# Altium PCB Backup.PcbDoc
Units mil, origin at the board's own origin, x right, y up, seen from the top; angles counter-clockwise.
Board outline 985 x 395 mil, 4 copper layers (Top, GND, Power, Bottom), stack 61.811 mil thick; 38 components, 30 nets, 145 pads, 33 vias.
Unrouted connection lines stored in the file: 67.
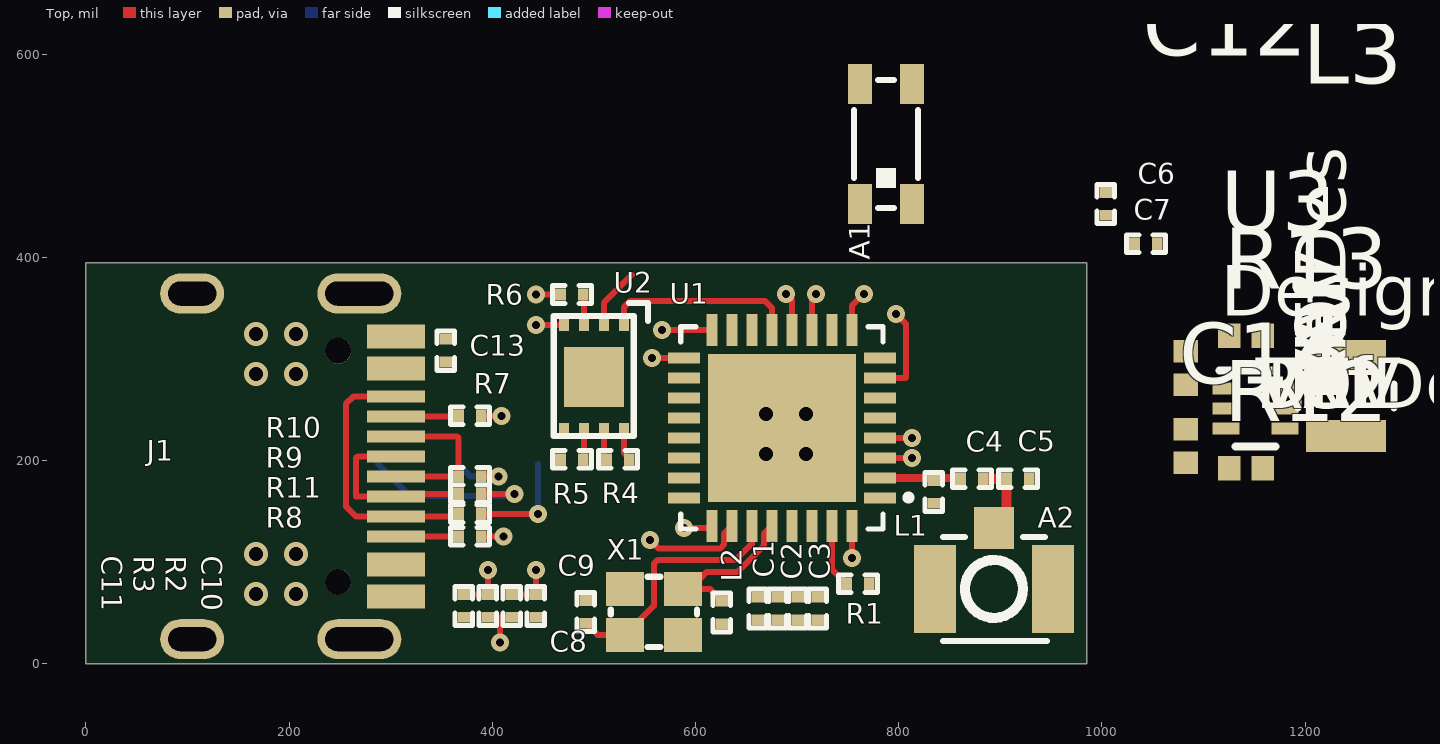
[diagram p0: Top view]
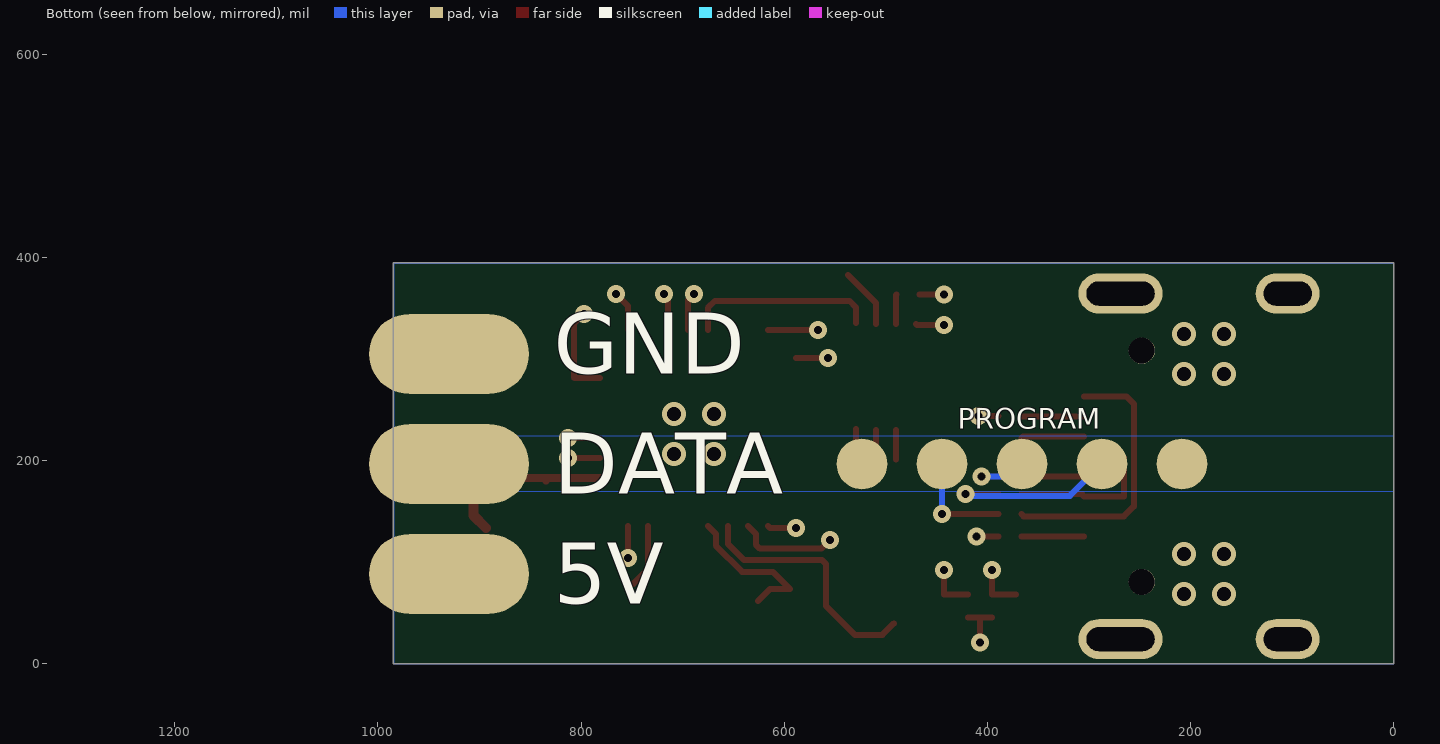
[diagram p1: Bottom view, seen from below]
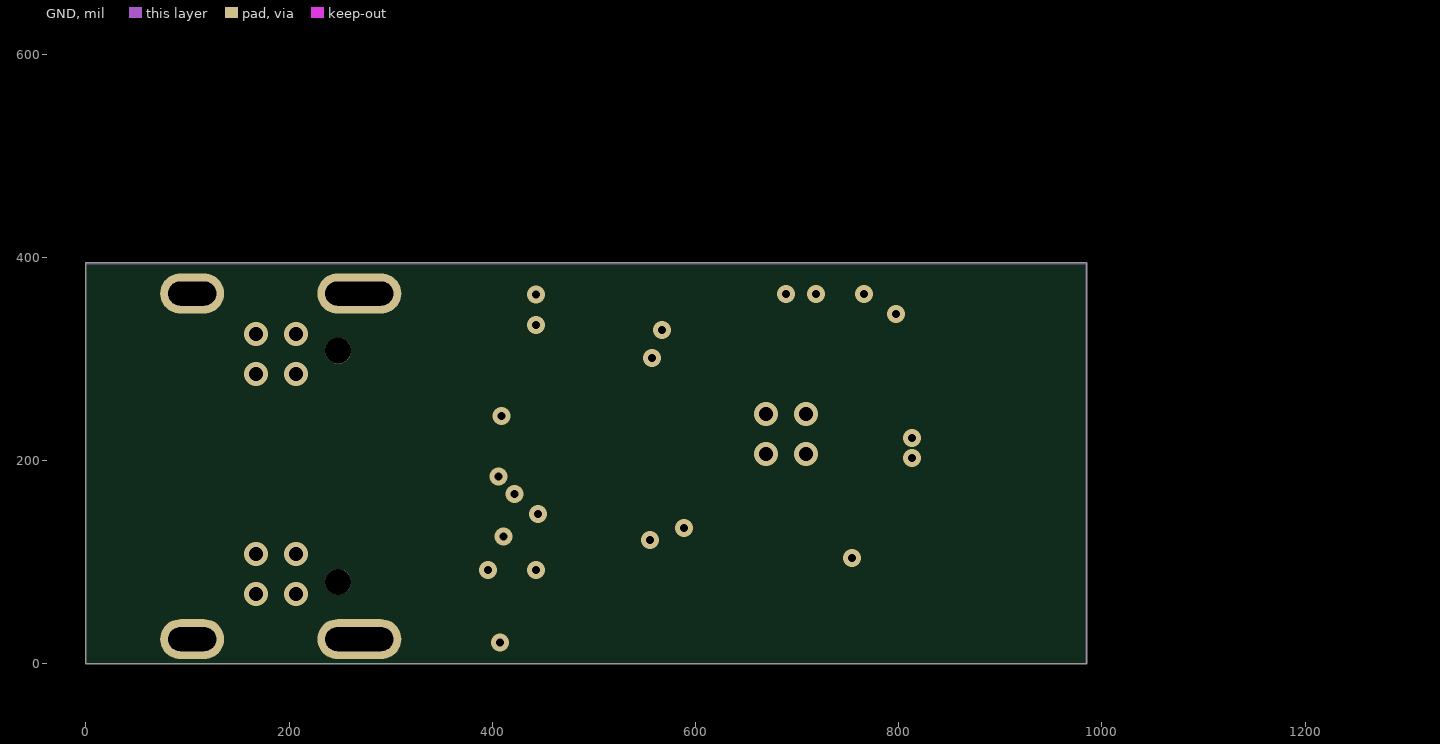
[diagram p2: GND]
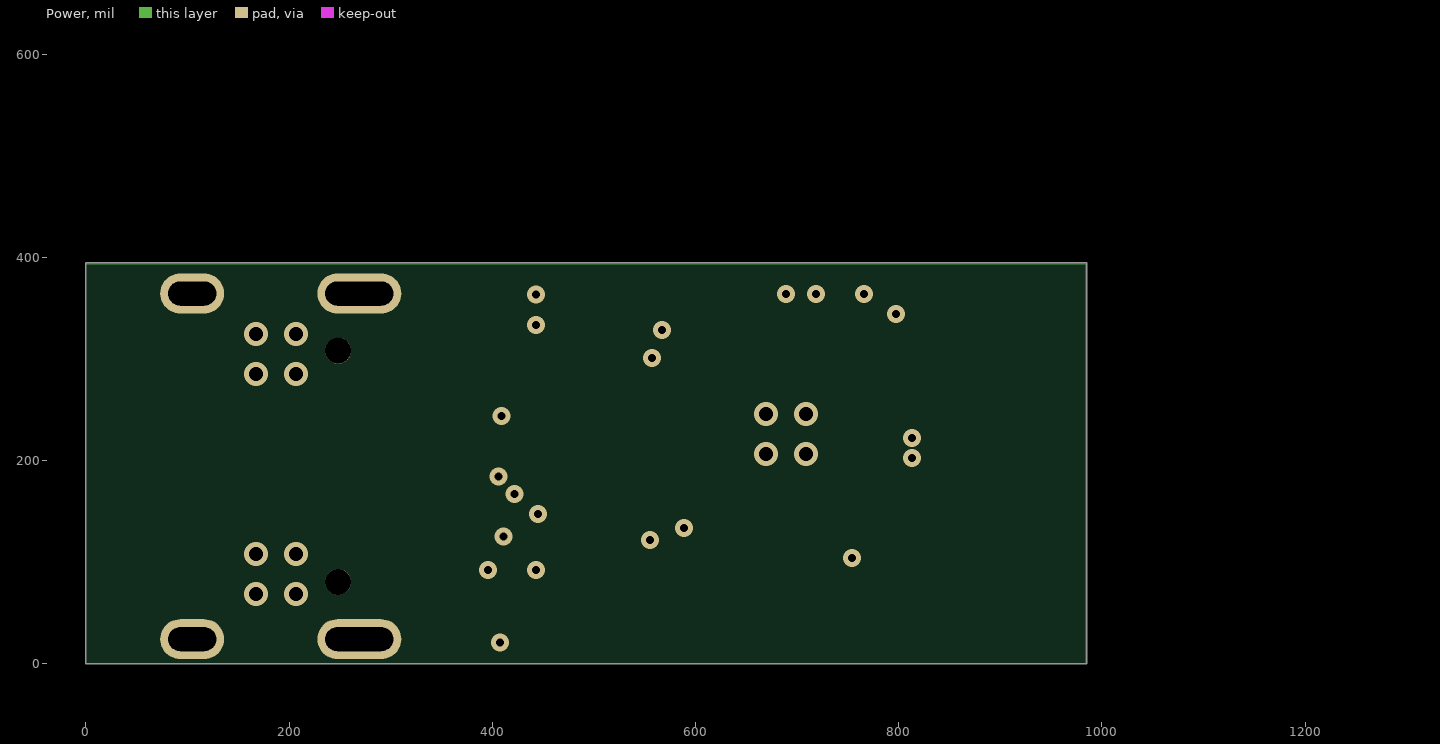
[diagram p3: Power]

## Layer stack, top to bottom
Top Solder: solder mask 0.4, Solder Resist, Dk 3.5
Top: signal copper 1.378
Prepreg: core 7.874, 7628, Dk 4.2
GND: signal copper 0.689
Core: prepreg 41.9291, FR4, Dk 4.2
Power: signal copper 0.689
Prepreg: core 7.874, 7628, Dk 4.2
Bottom: signal copper 1.378
Bottom Solder: solder mask 0.4, Solder Resist, Dk 3.5

## Board outline
0,0 0,395 985,395 985,0

## Design rules (kind name [scope] priority, off if disabled: settings)
Clearance [All] p1: gap=3.5 ignorepadtopadclearanceinfootprint=TRUE
ComponentClearance [All] p1 off: gap=10 collisioncheckmode=3 verticalgap=10 showdistances=FALSE
DiffPairsRouting [All] p1: maxlimit=10 minlimit=3.5 mostfreqgap=7.87 toplayer_minwidth=3.5 toplayer_maxwidth=15 toplayer_prefwidth=5.91 midlayer1_minwidth=3.5 midlayer1_maxwidth=15 midlayer1_prefwidth=5.91 midlayer2_minwidth=3.5 midlayer2_maxwidth=15 midlayer2_prefwidth=5.91 bottomlayer_minwidth=3.5 bottomlayer_maxwidth=15 bottomlayer_prefwidth=5.91 maxuncoupledlength=500
MatchedLengths usb [All] p1: tolerance=39.37 checknetsindiffpair=FALSE checkdiffpairvsdiffpair=TRUE checkxsignals=TRUE checkothers=TRUE
PolygonConnect 2pinconn [InNet('GND')] p1 off: connectstyle=Direct reliefconductorwidth=10 reliefentries=4 polygonreliefangle="90 Angle" airgapwidth=10
PolygonConnect vbus [InNet('VBUS')] p2 off: connectstyle=Direct reliefconductorwidth=10 reliefentries=4 polygonreliefangle="90 Angle" airgapwidth=10
PolygonConnect nothermals [InNet('VOUT')] p3 off: connectstyle=Direct reliefconductorwidth=0 reliefentries=4 polygonreliefangle="90 Angle" airgapwidth=0
PolygonConnect PolygonConnect_1 [All] p4 off: connectstyle=Relief reliefconductorwidth=10 reliefentries=4 polygonreliefangle="90 Angle" airgapwidth=10
RoutingVias [All] p1: holewidth=7.87 width=17.72 viastyle="Through Hole" minholewidth=7.87 minwidth=17.72 maxholewidth=248.03 maxwidth=50
SolderMaskExpansion [All] p1: expansion=4
Width [All] p1: maxlimit=39.37 minlimit=5 preferedwidth=7.87
28 further rules are at their usual default settings.

## Components (designator, comment, footprint, x,y, rotation, side; value= is the part's Value field where it differs from the comment)
A1 "2450AT18D0100" 2450AT18D0100_STD-L 787.4,511.81 r90 top
A2 "U.FL-R-SMT-1" "COAXIAL RF U.FL-R-SMT-1" 893.7,73.82 r180 top locked
C1 "1uF" CAPC0603X03L_C 681.1,54.53 r270 top value=N.C.
C2 "100uF" CAPC0603X03L_C 700.79,54.53 r270 top value=N.C.
C3 "1uF" CAPC0603X03L_C 720.47,54.53 r270 top value=N.C.
C4 "8.2pF" CAPC0603X03L_C 872.05,182.09 r180 top value=N.C.
C5 "2.4pF" CAPC0603X03L_C 917.32,182.09 r180 top value=N.C.
C6 "8.2pF" CAPC0603X03L_C 1003.94,452.76 r270 top value=N.C.
C7 "2.4pF" CAPC0603X03L_C 1043.31,413.39 r180 top value=N.C.
C8 "10pF" CAPC0603X03L_C 625.98,50.59 r270 top value=N.C.
C9 "10pF" CAPC0603X03L_C 492.13,51.18 r90 top value=N.C.
C10 "100nF" CAPC0603X03L_C 442.91,57.09 r270 top value=N.C.
C11 "100nF" CAPC0603X03L_C 372.05,57.09 r270 top value=N.C.
C12 "C1005X5R1A475K050BC" 0402 1082.68,291.34 r90 top value=4.7uF
C13 "1uF" CAPC0603X03L_C 354.33,308.31 r270 top value=N.C.
C14 "GRM188R60J226MEA0D" 0402 1082.68,214.57 r90 top value=22uF
J1 "USB-C" TYPE-C-31-M-12 305.12,322.48 r270 top locked
L1 "1.5nH" INDC0603X03L_C 834.65,169.29 r90 top
L2 "Ferride" INDC0603X03L_C 661.42,54.53 r270 top value=1.5nH
L3 "DFE252012F-1R0M=P2" DFE252012F 1240.16,263.78 r90 top value=1uH
PROGRAM "Programmer" ProgramPins 366.14,196.85 r180 bottom locked
R1 "12K" RESC0603X03L_C 759.84,78.74 r180 top value=0R
R2 "10K" RESC0603X03L_C 419.29,57.09 r270 top value=0R
R3 "10K" RESC0603X03L_C 395.67,57.09 r270 top value=0R
R4 "10K" RESC0603X03L_C 523.62,201.34 r0 top value=0R
R5 "50R" RESC0603X03L_C 478.35,201.34 r180 top value=0R
R6 "10K" RESC0603X03L_C 478.35,363.62 r0 top value=0R
R7 "1K" RESC0603X03L_C 377.95,244.09 r0 top value=0R
R8 "1K" RESC0603X03L_C 377.95,125.63 r0 top value=0R
R9 "0R" RESC0603X03L_C 377.95,167.32 r0 top
R10 "0R" RESC0603X03L_C 377.95,184.69 r0 top
R11 "0R" RESC0603X03L_C 377.95,147.64 r0 top
R12 "CRCW0402453KFKED" 0402 1141.73,192.56 r180 top value=453k
R13 "CRCW0402100KFKED" 0402 1141.73,322.83 r180 top value=100k
U1 "ESP8266EX" *QFN50P500X500X80-33N 685.04,232.28 r180 top locked
U2 "FM25Q08A-DN-T-G" FM25Q08A 470.47,334.65 r0 top
U3 "TLV62568ADRLR" DRL0006A 1151.18,251.61 r0 top value=N/A
X1 "26MHZ" BT-XTAL_2016 559.06,51.18 r0 top value=32MHz

## Footprints (in the part's own frame and the unit in brackets; to place one, negate y for a bottom-side part, rotate by r counter-clockwise, add the part's x,y. Pads: shape width x height; smd on the part's side, far side on the other; paste and mask are expansions set on the pad)
0402 [mil]
  rect 22x24 smd: 1(-16.5,0) 2(16.5,0)
  body extent -22,-12 22,12, height 22
2450AT18D0100_STD-L [mm]
  rect 1x0.6 smd mask+0.051: 1(-1.5,-0.65) 2(-1.5,0.65) 2(1.5,-0.65) 2(1.5,0.65)
  Top pour cut-out: -2,-5.05 -2,0.95 2,0.95 2,-5.05
  Bottom pour cut-out: -2,-5.05 -2,0.95 2,0.95 2,-5.05
  silkscreen extent -1.6,-0.8 1.6,0.8, body extent -1.61,-0.81 1.61,0.81, height 1.2
*QFN50P500X500X80-33N [mm]
  rect 0.8x0.27 smd: 1(-2.45,1.75) 2(-2.45,1.25) 3(-2.45,0.75) 4(-2.45,0.25) 5(-2.45,-0.25) 6(-2.45,-0.75) 7(-2.45,-1.25) 8(-2.45,-1.75) 17(2.45,-1.75) 18(2.45,-1.25) 19(2.45,-0.75) 20(2.45,-0.25) 21(2.45,0.25) 22(2.45,0.75) 23(2.45,1.25) 24(2.45,1.75)
  rect 0.27x0.8 smd: 9(-1.75,-2.45) 10(-1.25,-2.45) 11(-0.75,-2.45) 12(-0.25,-2.45) 13(0.25,-2.45) 14(0.75,-2.45) 15(1.25,-2.45) 16(1.75,-2.45) 25(1.75,2.45) 26(1.25,2.45) 27(0.75,2.45) 28(0.25,2.45) 29(-0.25,2.45) 30(-0.75,2.45) 31(-1.25,2.45) 32(-1.75,2.45)
  rect 3.7x3.7 smd: 33(0,0)
  silkscreen extent -3.24,-2.53 2.53,2.53, body extent -2.53,-2.53 2.53,2.53, height 0.85
BT-XTAL_2016 [mm]
  rect 0.95x0.85 smd: 1(-0.725,-0.575) 2(0.725,-0.575) 3(0.725,0.575) 4(-0.725,0.575)
  silkscreen extent -1.08,-0.88 1.08,0.88, body extent -1.05,-0.85 1.05,0.85, height 0.56
CAPC0603X03L_C [mm]
  rect 0.27x0.3 smd: 1(-0.285,0) 2(0.285,0)
  silkscreen extent -0.49,-0.22 0.49,0.22, body extent -0.3,-0.15 0.31,0.15, height 0.3
"COAXIAL RF U.FL-R-SMT-1" [mm]
  rect 1x1.05 smd: 1(0,-1.525)
  rect 1.05x2.2 smd: 2(-1.475,0) 2(1.475,0)
  Top pour cut-out: 0.85,1.3 -0.85,1.3 -0.85,-1.525 0.85,-1.525
  silkscreen extent -1.32,-1.3 1.28,1.3, body extent -1.5,-1.6 1.5,1.5, height 1.25
DFE252012F [mm]
  rect 0.8x2 smd paste+0 mask+0.051: 1(-1,0) 2(1,0)
  silkscreen extent -0.3,-1.2 0.3,1.2, body extent 0,0 0.25,0.25, height 0.25
DRL0006A [mm]
  rect 0.67x0.3 smd paste+0 mask+0.051: 1(-0.74,0.5) 2(-0.74,0) 3(-0.74,-0.5) 4(0.74,-0.5) 5(0.74,0) 6(0.74,0.5)
  silkscreen extent -0.9,-0.95 0.5,0.95, body extent 0,0 0.25,0.25, height 0.25
FM25Q08A [mm] "Flashboi"
  rect 0.25x0.35 smd: 1(1.5,0) 2(1,0) 3(0.5,0) 4(0,0) 5(0,-2.65) 6(0.5,-2.65) 7(1,-2.65) 8(1.5,-2.65)
  rect 1.5x1.5 smd: 4(0.75,-1.325)
  silkscreen extent -0.25,-2.8 2.1,0.53, body extent -0.13,-2.79 1.65,0.13, height 0.75
INDC0603X03L_C [mm]
  rect 0.27x0.3 smd: 1(-0.285,0) 2(0.285,0)
  silkscreen extent -0.49,-0.22 0.49,0.22, body extent -0.31,-0.16 0.31,0.16, height 0.26
ProgramPins [mm]
  round 1.27 smd: 1(4,0) 2(2,0) 3(0,0) 4(-2,0) 5(-4,0)
RESC0603X03L_C [mm]
  rect 0.27x0.3 smd: 1(-0.285,0) 2(0.285,0)
  silkscreen extent -0.49,-0.22 0.49,0.22, body extent -0.3,-0.15 0.3,0.15, height 0.23
TYPE-C-31-M-12 [mm]
  rect 0.6x1.45 smd: 1(0,0) 1(6.5,0) 2(0.8,0) 2(5.7,0)
  rect 0.3x1.45 smd: 3(1.5,0) 4(2,0) 5(2.5,0) 6(3,0) 7(3.5,0) 8(4,0) 9(4.5,0) 10(5,0)
  oval 1x2.1 hole 1.7 slot 0.6 at 0 deg: 11(-1.07,-0.915) 11(7.57,-0.915)
  oval 1x1.6 hole 1.2 slot 0.6 at 0 deg: 11(-1.07,-5.095) 11(7.57,-5.095)
  round 0.65 hole 0.65: 12(0.36,-1.445) 12(6.14,-1.445)
  body extent -1.27,-7.75 7.68,0, height 3.27

## Part data
A1: "2.45 GHz chip antenna", Manufacturer="Johanson Technology", Part Number="Johanson 2450AT18D0100_STD-L", Part number IPS=N.A., Supplier Part Number 1=2450AT18D0100E, Artikkelnr Noca=53059035, ComponentLink1Description=Datasheet, ComponentLink2Description="Supplier link", Footprint Doc=2450AT18D0100, HelpURL=http://www.johansontechnology.com/datasheets/antennas/2450AT18D0100.pdf, LatestRevisionDate=2016-06-02, Manufacturer Part Number=2450AT18D0100, Pin Count=4, Published=2016-01-12, Publisher="Nordic Semiconductor", Supplier 1=Digi-Key, Supplier 2=Mouser, Supplier Part Number 2=609-2450AT18D0100E
A2: "ONN U.FL RCPT STR 50 OHM SMD", Manufacturer="Hirose Electric Co Ltd", Part number IPS=N.A., Supplier Part Number 1=H11891DKR-ND, Artikkelnr Noca=N.A., ComponentLink1Description=Datasheet, ComponentLink1URL=https://media.digikey.com/pdf/Data%20Sheets/Hirose%20PDFs/UFL%20Series.pdf, ComponentLink2Description="Supplier link", Footprint Doc="COAXIAL RF U.FL-R-SMT-1", LatestRevisionDate=2018-05-07, Manufacturer Part Number=U.FL-R-SMT-1, Part Number=U.FL-R-SMT-1, Pin Count=3, Published=2018-05-07, Publisher="Nordic Semiconductor", Supplier 1=Digi-Key
C1 C2 C3 C4 C5 C6 C7 C8 C9 C10 C11 C13: "Not mounted", Part Number=C0201-N.C., Part number IPS=N.A., Artikkelnr Noca=N.A., Assembly="Not mounted", ComponentLink1Description=Datasheet, ComponentLink2Description="Supplier link", Footprint Doc=0201, LatestRevisionDate=2014-11-13, Note="Chip Cap", Pin Count=2, Published=2014-11-13, Publisher="Nordic Semiconductor"
C12: "C1005X5R1A475K05", Manufacturer Name=TDK, Manufacturer Part Number=C1005X5R1A475K050BC, PackageReference=C1005X5R1A475K050BC
C14: "GRM188R60J226MEA", Manufacturer Name=MuRata, Manufacturer Part Number=GRM188R60J226MEA0D, PackageReference=GRM188R60J226MEA0D
L1 L2: "Chip Inductor", Part Number=L0201-1n5, Part number IPS=N.A., Artikkelnr Noca=N.A., ComponentLink1Description=Datasheet, ComponentLink2Description="Supplier link", Footprint Doc=0201, LatestRevisionDate=2013-04-10, Note="High frequency chip inductor ±5%", Pin Count=2, Published=2013-04-10, Publisher="Nordic Semiconductor"
L3: "DFE252012F-1R0M=", Manufacturer Name="MuRata Toko", Manufacturer Part Number=DFE252012F-1R0M=P2, PackageReference=DFE252012F-1R0M=P2
PROGRAM: "Programmer header"
R1 R2 R3 R4 R5 R6 R7 R8 R9 R10 R11: "Resistor, ±5%, 0.05W", Part Number=R0201-0R, Part number IPS=00000003245, Artikkelnr Noca=N.A., ComponentLink1Description=Datasheet, ComponentLink2Description="Supplier link", Footprint Doc=0201, LatestRevisionDate=2017-11-09, Note="Chip Res 5%", Pin Count=2, Published=2014-11-13, Publisher="Nordic Semiconductor"
R12 R13: Manufacturer Name=Vishay-Dale
  R12: Manufacturer Part Number=CRCW0402453KFKED, PackageReference=CRCW0402453KFKED
  R13: Manufacturer Part Number=CRCW0402100KFKED, PackageReference=CRCW0402100KFKED
U1: Package="VFQFN-32 Espressif Systems", Availability=Unavailable, MF="Espressif Systems", MP=ESP8266EX, Price=None, SnapEDA_Link=https://www.snapeda.com/parts/ESP8266EX/Espressif%20Systems/view-part/555861/?ref=snap
U2: library part Flash, "FM25Q08A-DN-T-G, 8Mb flash, compadable with  FM25W02-SN-T-G, 2Mb flash"
U3: Manufacturer Name="Texas Instruments", Manufacturer Part Number=TLV62568ADRLR, PackageReference=TLV62568ADRLR
X1: "X201626MOD4SI", Manufacturer=Golledge, Manufacturer Part Number=MP06003, Part Number=XTAL_SMD2016_32MHz_8pF_Golledge, Part number IPS=N.A., Artikkelnr Noca=22010050, ComponentLink1Description=Datasheet, ComponentLink2Description="Supplier link", Footprint Doc=XTAL_2016, HelpURL=\\hizz\pro\app9717\Datasheet\crystals\Golledge\mp06003.pdf, LatestRevisionDate=2016-11-02, Note="XTAL SMD 32.000MHz", Pin Count=4, Published=2016-11-02, Publisher="Nordic Semiconductor", Supplier 1="Link Nordic"

## Free pads (board coordinates)
  oval 157.48x78.74 smd far side: 5(930,88.58) 5(930,196.85) 5(930,305.12)

## Via types
v1: diameter 17.72, hole 7.87, Top to Bottom, 21 vias
v2: diameter 23.62, hole 13.78, Top to Bottom, 12 vias

## Nets (pads, with @x,y where several pads share a name; then routed paths per layer and width w, separated by ;. In a path a pad name is that pad's centre, name@x,y a point inside that pad or via, vN(x,y) a via of type N, cw(c..) or ccw(c..) an arc to the next point about the centre after c; other vN are vias at no path point)
0: U3.2
3.3V: C1.1 C2.1 C3.1 L2.1 U1.1 U1.3 U1.4 U1.11 U1.17 U1.29 U1.30 | length 131.6
  Top w6: v1(557.09,301.18) U1.17 ; U1.11 714.57,360.24 v1(718.5,364.17) ; U1.3 v1(812.99,202.76) ; U1.4 v1(812.99,222.44)
3V3: C14.1 L2.2 L3.2 R2.2 R3.2 R4.2 R6.1 R12.1 U2.8 | length 103.6
  Top w6: R3.2 407.48,45.87 ; v1(407.48,21.3) 407.48,45.87 ; R2.2 407.48,45.87 ; v1(442.91,363.62) R6.1 ; U2.8@529.53,231.3 529.53,207.64 R4.2@534.84,202.32
5V: C12.1 C13.2 J1.2 pad.5@930,88.58 PROGRAM.1 U3.3 U3.5
EN: C10.1 R2.1 U1.7 | length 140.3
  Top w6: R2.1 C10.1 v1(442.91,92.52) ; U1.7 806.69,281.5 807.09,281.89 807.09,334.65 v1(797.24,344.49)
GND: A1.2 A2.2 C1.2 C2.2 C3.2 C5.1 C7.2 C8.2 C9.2 C10.2 C11.2 C12.2 C13.1 C14.2 J1.1 J1.11 L1.1 pad.5@930,305.12 PROGRAM.5 R1.1 R7.2 R8.2 R13.2 U1.33 U2.4 X1.2 X1.4 | length 69.8
  Top w6: R8.2 v1(411.06,125.63) ; R7.2 v1(409.09,244.09) ; v1(442.91,333.66) 469.49,333.66 U2.4@470.47,334.65
  other v2: 669.29,206.69 708.66,206.69 669.29,246.06 708.66,246.06
LED: pad.5@930,196.85 U1.16 | length 49.2
  Top w6: v1(566.93,328.74) U1.16
MTCK: U1.12 U2.5 | length 37.9
  Top w6: v1(688.98,364.17) 694.88,358.27 U1.12
MTDI: U1.10 U2.2 | length 59.6
  Top w6: U2.2 509.84,355.31 537.4,382.87
MTDO: U1.13 U2.1 | length 188.2
  Top w6: U2.1@529.53,335.63 529.53,350.98 535.87,357.33 668.26,357.33 675.2,350.39 U1.13
MTMS: R5.2 U1.9 | length 40.3
  Top w6: U1.9 753.94,352.36 v1(765.75,364.17)
NetA1_1: A1.1 C6.1 C7.1
NetA2_1: A2.1 C4.1 C5.2 | length 76.2
  Top w10: C4.1 C5.2 906.1,146.26 A2.1
NetC4_2: C4.2 C6.2 L1.2 U1.2 | length 82.3
  Top w8: U1.2 L1.2@834.64,183.07 ; L1.2 L1.2@834.64,183.07 ; C4.2 859.84,183.07 L1.2@834.64,183.07
NetC8_1: C8.1 U1.28 X1.3 | length 149.6
  Top w6: C8.1 613.98,73.82 594.49,73.82 604.23,83.56 611.22,90.55 641.39,90.55 667.33,116.49 667.33,127.96 U1.28
NetC9_1: C9.1 U1.27 X1.1 | length 247.1
  Top w6: C9.1 503.54,28.54 X1.1 559.06,57.09 559.06,98.43 562.99,102.36 639.76,102.36 655.51,118.11 U1.27
NetJ1_3: J1.3 J1.9 R11.1 | length 268.9
  Top w6: J1.3 263.43,263.43 255.91,255.91 255.91,155.16 265.75,145.31 J1.9 364.41,145.31 R11.1
NetJ1_4: J1.4 R7.1 | length 61.8
  Top w6: J1.4 366.38,243.74 R7.1
NetJ1_5: J1.5 J1.7 R10.1 | length 161.6
  Top w6: J1.7 R10.1 366.73,222.44 365.12,224.06 J1.5
NetJ1_6: J1.6 J1.8 R9.1 | length 179.7
  Top w6: J1.6 267.36,204.37 265.75,202.76 265.75,165 J1.8 307.44,167.32 R9.1
NetJ1_10: J1.10 R8.1 | length 61.6
  Top w6: J1.10 R8.1
NetL3_1: L3.1 U3.4
NetR1_2: R1.2 U1.31 | length 63
  Top w6: U1.31 734.25,93.11 R1.2
NetR4_1: R4.1 U2.7 | length 30
  Top w6: U2.7 509.84,203.9 R4.1
NetR5_1: R5.1 U2.6 | length 29
  Top w6: R5.1@490.16,201.34 U2.6
NetR6_2: R6.2 U2.3 | length 29.2
  Top w6: R6.2 490.16,363.03 U2.3
NetR12_2: R12.2 R13.1 U3.1
RST: C11.1 PROGRAM.4 R3.1 R11.2 U1.32 | length 184.3
  Top w6: C11.1 R3.1 v1(395.67,92.52) ; R11.2 v1(444.88,147.64) ; v1(753.94,104.33) U1.32
  Bottom w6: v1(444.88,147.64) PROGRAM.4
RXD0: PROGRAM.3 R10.2 U1.25 | length 89.8
  Top w6: R10.2 v1(405.87,184.69) ; v1(588.58,133.86) 614.17,133.86 U1.25
  Bottom w6: PROGRAM.3 378.31,184.69 v1(405.87,184.69)
TXD0: PROGRAM.2 R9.2 U1.26 | length 280.1
  Top w6: R9.2 v1(421.58,167.32) ; v1(555.12,122.05) 563.59,113.58 624.15,113.58 627.96,117.39 627.96,127.96 U1.26
  Bottom w6: PROGRAM.2 318.9,165.35 419.6,165.35 v1(421.58,167.32)
pads on no net: J1.12 U1.5 U1.6 U1.8 U1.14 U1.15 U1.18 U1.19 U1.20 U1.21 U1.22 U1.23 U1.24 U3.6
copper on no net:
  other v2: 167.32,68.9 206.69,68.9 167.32,108.27 206.69,108.27 167.32,285.43 206.69,285.43 167.32,324.8 206.69,324.8

## Polygon pours and split planes (outlines as drawn)
GND on Bottom "Bottom-GND" (solid, shelved, pour order 4): 0,393.7 984.25,393.7 984.25,224.41 0,224.41
5V on Bottom "Bottom-5V" (solid, shelved, pour order 0): 0,169.29 984.25,169.29 984.25,0 0,0
3.3V on Power "Power-3V3" (solid, shelved, pour order 2): 0,393.7 984.25,393.7 984.25,0 0,0
no net on GND "GND-No Net" (solid, shelved, pour order 6): 0,393.7 984.25,393.7 984.25,0 0,0

## Silkscreen, mask and mechanical layers (free items; w line width, h text height)
Bottom Overlay:
  text "GND" at 826.77,285.43 h60
  text "DATA" at 826.77,167.32 h60
  text "5V" at 826.77,59.06 h60
Mechanical 1:
  lines w10: 984.25,0 0,0 0,393.7 984.25,393.7 984.25,7.4

## Text inside footprints (layer, text, board x,y; h text height)
L3: Top Overlay "TOL" at 1240.16,263.78 h50 r90; Top Overlay "VAL" at 1240.16,263.78 h50 r90; Top Overlay "DEV" at 1240.16,263.78 h50 r90; Top Overlay "PN" at 1240.16,263.78 h50 r90; Top Overlay "DEV" at 1240.16,263.78 h50 r90; Top Overlay "RefDes" at 1240.16,263.78 h50 r90
U3: Top Overlay "TOL" at 1151.18,251.61 h50; Top Overlay "VAL" at 1151.18,251.61 h50; Top Overlay "DEV" at 1151.18,251.61 h50; Top Overlay "PN" at 1151.18,251.61 h50; Top Overlay "DEV" at 1151.18,251.61 h50; Top Overlay "RefDes" at 1151.18,251.61 h50; Top Overlay "Designator312" at 1117.18,342.61 h50